# Altium PCB PWTSout.PcbDoc
Units mil, origin at the board's own origin, x right, y up, seen from the top; angles counter-clockwise.
Board outline 2315 x 3125 mil, 2 copper layers (Top Layer, Bottom Layer); 128 components, 32 nets, 363 pads, 71 vias.
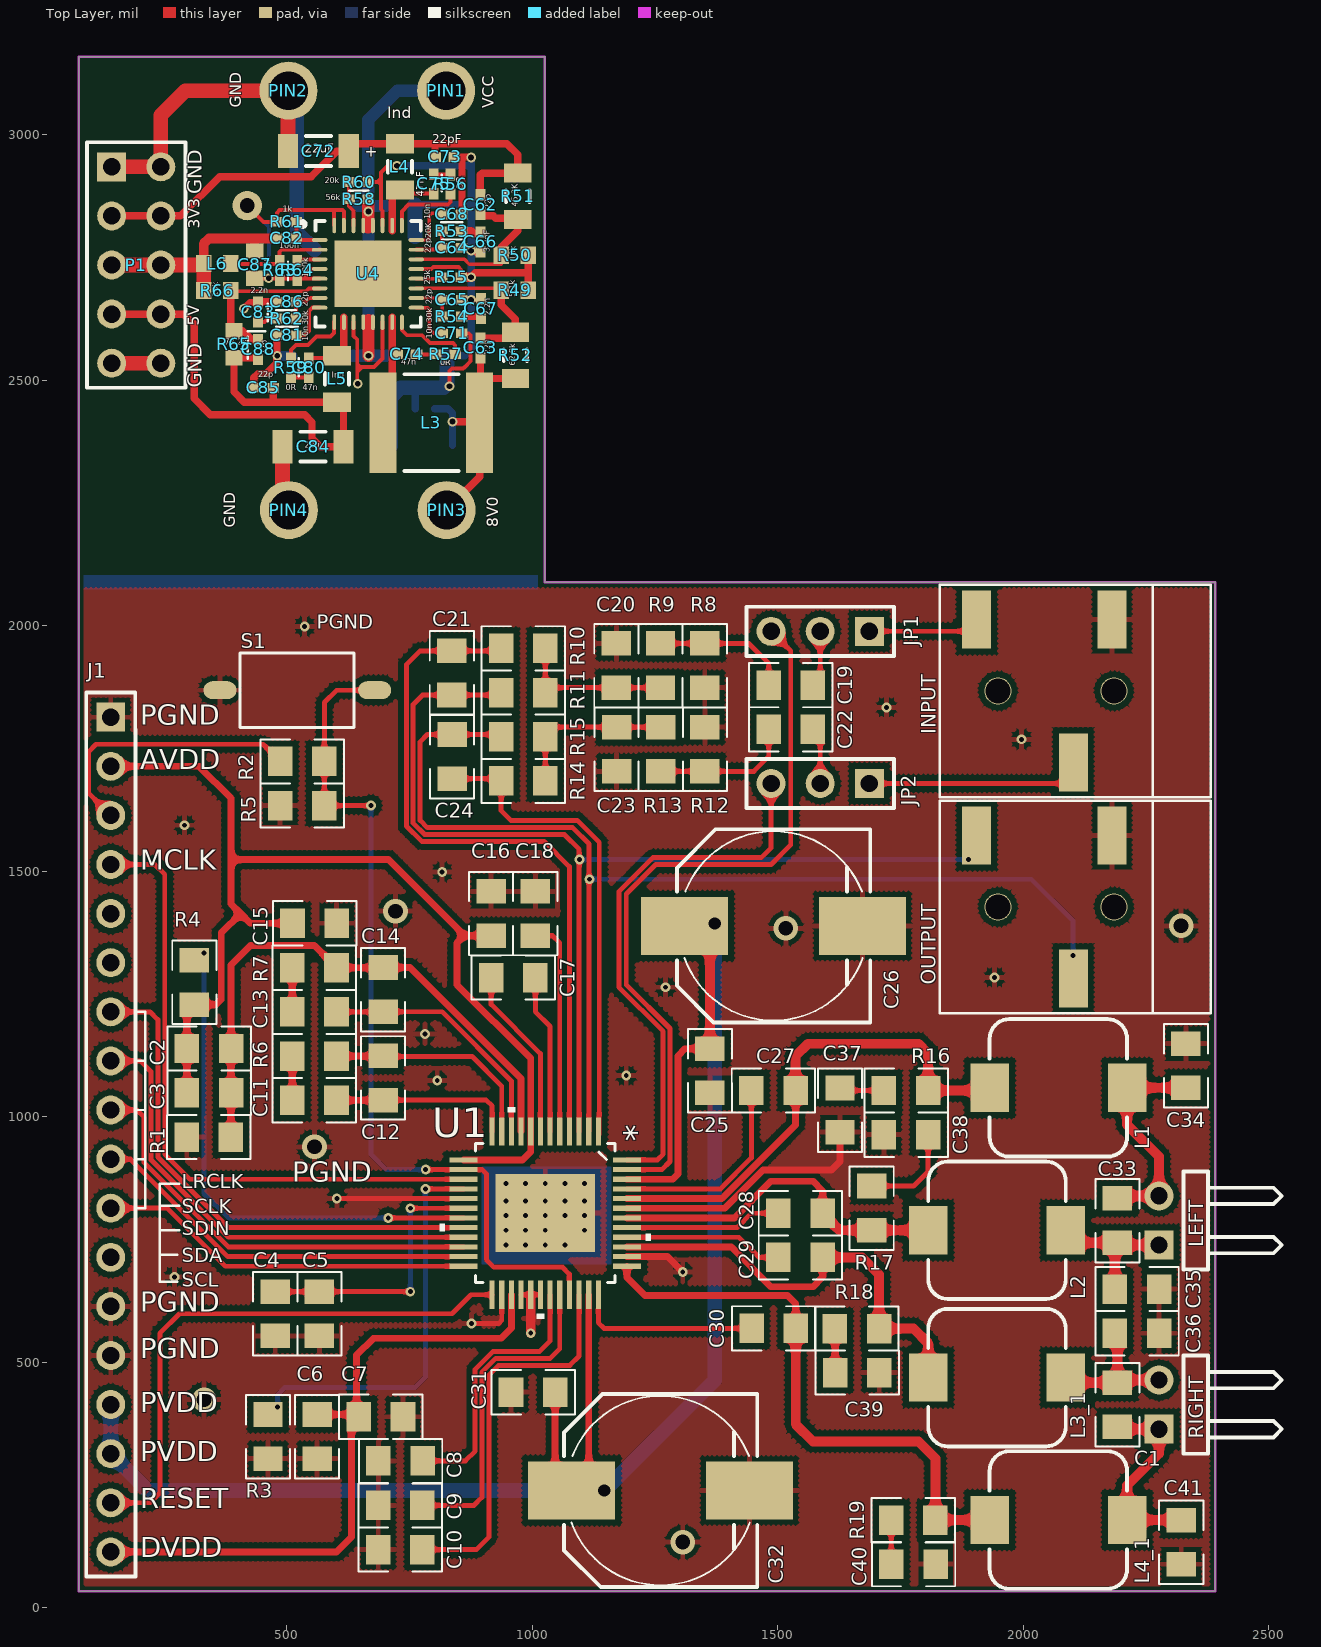
[diagram p0: Top Layer view]
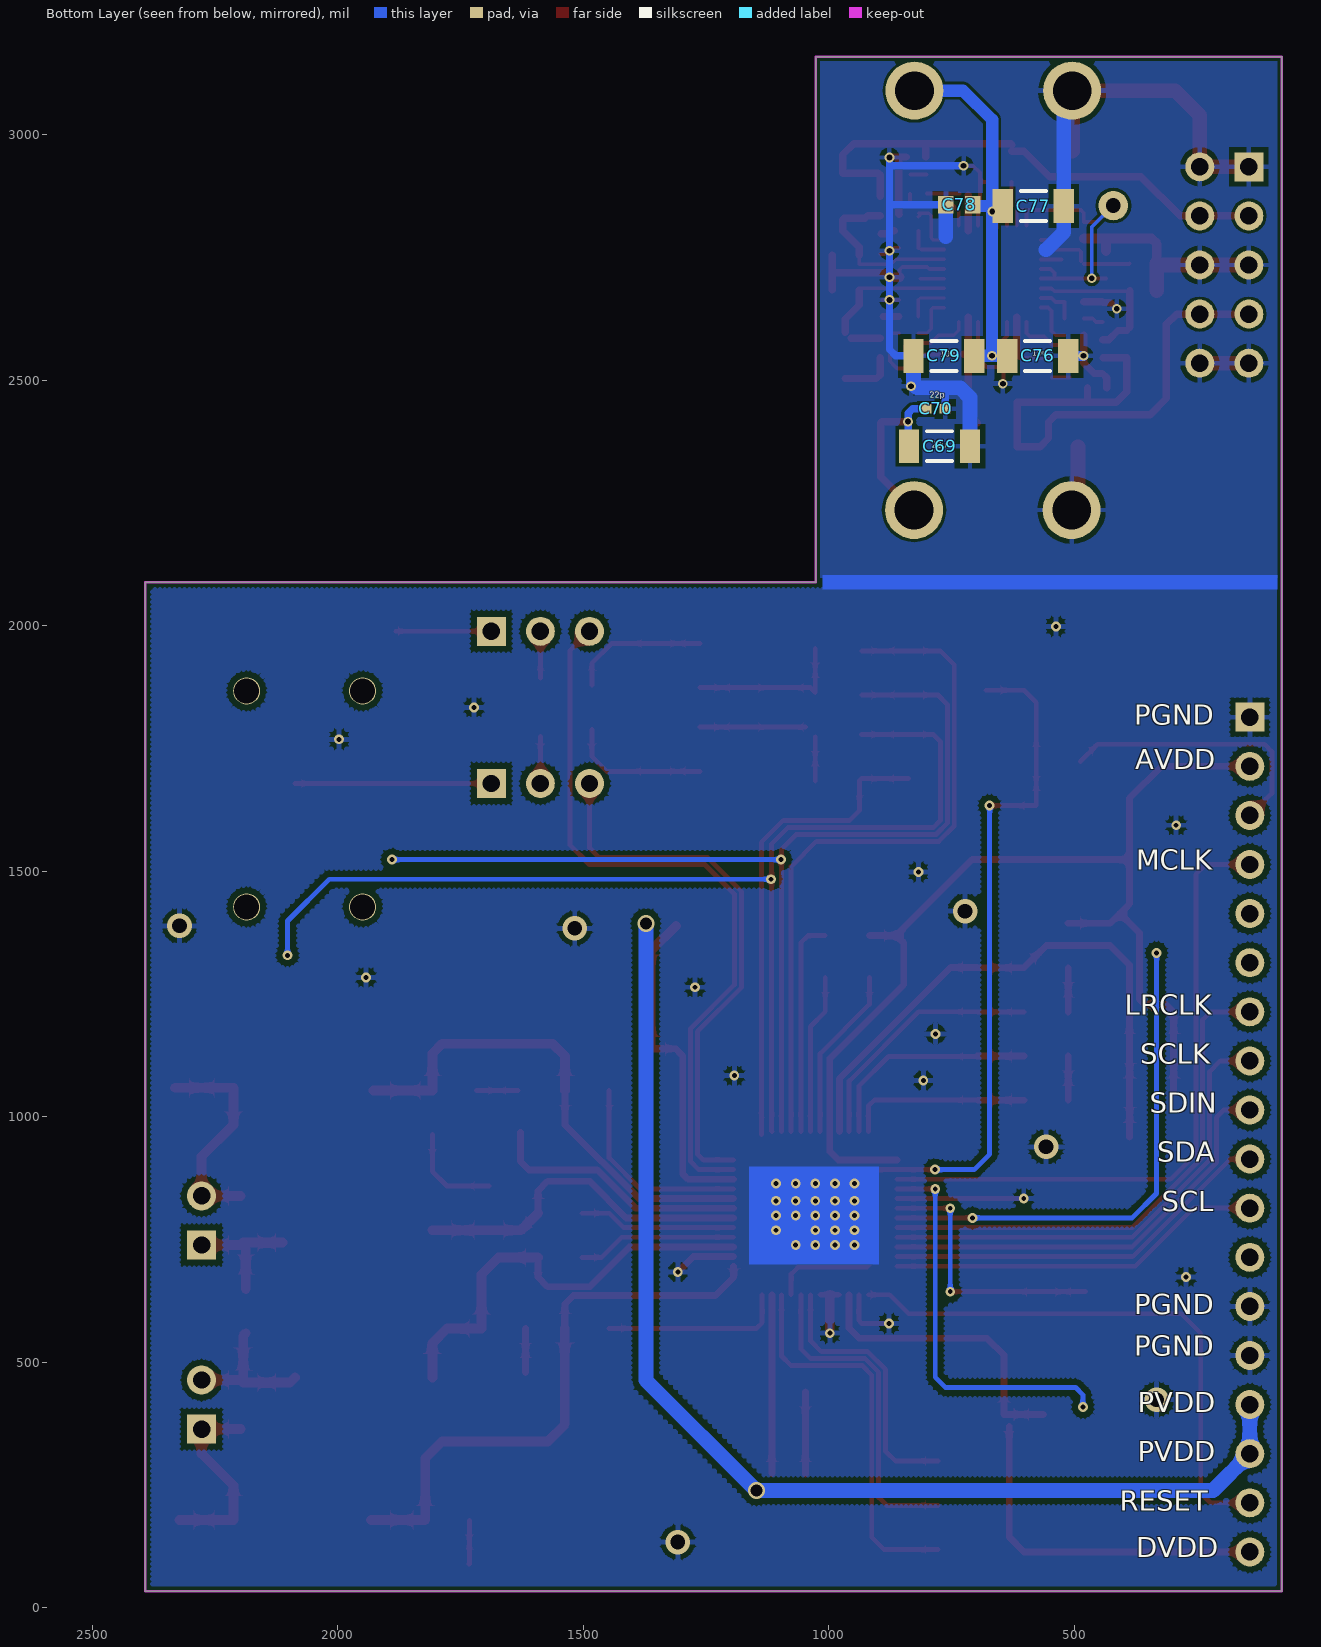
[diagram p1: Bottom Layer view, seen from below]

## Layer stack, top to bottom
Top Layer: signal copper 1.4
Dielectric: dielectric 12.6, FR-4, Dk 4.8
Bottom Layer: signal copper 1.4

## Board outline
77,34 77,3159 1026,3159 1026,2089 2392,2089 2392,34

## Design rules (kind name [scope] priority, off if disabled: settings)
Clearance [All] p1: gap=6
PolygonConnect [All] p1: connectstyle=Relief reliefconductorwidth=10 reliefentries=4 polygonreliefangle="90 Angle" airgapwidth=10
RoutingVias [All] p1: holewidth=28 width=50 viastyle="Through Hole" minholewidth=28 minwidth=50 maxholewidth=28 maxwidth=50
SolderMaskExpansion [All] p1: expansion=4
Width [All] p1: maxlimit=60 minlimit=6 preferedwidth=10 minimp=50.000000 maximp=50.000000 favimp=50.000000
28 further rules are at their usual default settings.

## Classes and differential pairs
component class POWER_TS: C62 C63 C64 C65 C66 C67 C68 C69 C70 C71 C72 C73 C74 C75 C76 C77 C78 C79 C80 C81 C82 C83 C84 C85 C86 C87 C88 L3 L4 L5 L6 P1 PIN1 PIN2 PIN3 PIN4 R49 R50 R51 R52 R53 R54 R55 R56 R57 R58 R59 R60 R61 R62 R63 R64 R65 R66 U4

## Components (designator, comment, footprint, x,y, rotation, side; value= is the part's Value field where it differs from the comment)
C1 "DNP/1206" 0805_C 2192,369 r90 top
C2 "10uF/6.3V" 0805_C 387,1139 r180 top
C3 "0.1uF/10V" 0805_C 387,1049 r180 top
C4 "4.7uF/6.3V" 0805_C 477.27,643.81 r270 top
C5 "0.1uF/10V" 0805_C 567.27,643.81 r270 top
C6 "10uF/6.3V" 0805_C 562,304 r90 top
C7 "0.1uF/10V" 0805_C 737,389 r180 top
C8 "0.1uF/10V" 0805_C 777,299 r180 top
C9 "2200pF/50V" 0805_C 687,209 r0 top
C10 "1uF/25V" 0805_C 687,119 r0 top
C11 "0.047uF/16V" 0805_C 512,1034 r0 top
C12 "4700pF/50V" 0805_C 697,1124 r270 top
C13 "0.047uF/16V" 0805_C 512,1214 r0 top
C14 "4700pF/50V" 0805_C 697,1304 r270 top
C15 "10uF/6.3V" 0805_C 602,1394 r180 top
C16 "1uF/25V" 0805_C 917,1459 r270 top
C17 "1uF/25V" 0805_C 917,1284 r0 top
C18 "1uF/25V" 0805_C 1007,1459 r270 top
C19 "1.5uF/50V" 0805_C 1572,1879 r180 top
C20 "1000pF/50V" 0805_C 1172,1964 r270 top
C21 "220pF/50V" 0805_C 837,1949 r270 top
C22 "1.5uF/50V" 0805_C 1572,1789 r180 top
C23 "1000pF/50V" 0805_C 1172,1704 r90 top
C24 "220pF/50V" 0805_C 837,1689 r90 top
C25 "0.1uF/50V" 0805_C 1362,1049 r90 top
C26 "220uF/35V" C-RB-S10 1492,1389 r0 top
C27 "0.033uF/50V" 0805_C 1447,1054 r0 top
C28 "0.033uF/50V" 0805_C 1502,804 r0 top
C29 "0.033uF/50V" 0805_C 1502,714 r0 top
C30 "0.033uF/50V" 0805_C 1537,569 r180 top
C31 "0.1uF/50V" 0805_C 1047,439 r180 top
C32 "220uF/35V" C-RB-S10 1262,239 r0 top
C33 "DNP/1206" 0805_C 2192,744 r90 top
C34 "0.33uF/50V" 0805_C 2332,1149 r270 top
C35 "0.33uF/50V" 0805_C 2277,649 r180 top
C36 "0.33uF/50V" 0805_C 2277,559 r180 top
C37 "330pF/50V" 0805_C 1627,969 r90 top
C38 "330pF/50V" 0805_C 1717,964 r0 top
C39 "330pF/50V" 0805_C 1707,479 r180 top
C40 "330pF/50V" 0805_C 1821.81,88.73 r180 top
C41 "0.33uF/50V" 0805_C 2322,89 r90 top
C62 "Cap" 0402 895,2858 r90 top
C63 "Cap" 0402 895,2566 r90 top
C64 "Cap" 0402 836.69,2770 r180 top
C65 "Cap" 0402 837,2664 r0 top
C66 "Cap" 0402 895,2782 r90 top
C67 "Cap" 0402 896,2646 r90 top
C68 "Cap" 0402 836.68,2838 r180 top
C69 "Cap" 1206 774,2366 r0 bottom
C70 "Cap" 0402 782,2442 r0 bottom
C71 "Cap" 0402 837,2596 r0 top
C72 "Cap" 1206 565,2967 r0 top
C73 "Cap" 0402 822,2955 r180 top
C74 "Cap" 0402 745,2553 r180 top
C75 "Cap" 0402 800,2900 r90 top
C76 "Cap" 1206 574,2550 r180 bottom
C77 "Cap" 1206 583,2855 r180 bottom
C78 "Cap" 1608[0603] 734,2858 r180 bottom
C79 "Cap" 1206 765,2550 r180 bottom
C80 "Cap" 0402 545,2525.69 r270 top
C81 "Cap" 0402 500,2592 r0 top
C82 "Cap" 0402 500,2789 r0 top
C83 "Cap" 0402 442,2639 r270 top
C84 "Cap" 1206 554,2365 r0 top
C85 "Cap" 0402 453,2485 r0 top
C86 "Cap" 0402 500,2660 r180 top
C87 "Cap" 1608[0603] 435,2736 r270 top
C88 "Cap" 0402 442,2563 r270 top
INPUT "Headphone" HeadPhone-3.5mm 2382,2084 r270 top
J1 "Header 18" HDR1X18 142,1814 r270 top
JP1 "Header 3" HDR1X3 1687,1989 r180 top
JP2 "Header 3" HDR1X3 1687,1679 r180 top
L1 "15uH" L-SMD-7 2072,1059 r0 top
L2 "15uH" L-SMD-7 1947,769 r0 top
L3 "Inductor" 2220 795,2414 r0 top
L3_1 "15uH" L-SMD-7 1947,469 r0 top (schematic designator L3)
L4 "Inductor" C2012 731,2935 r270 top
L4_1 "15uH" L-SMD-7 2072,179 r0 top (schematic designator L4)
L5 "Inductor" C2012 603,2503 r270 top
L6 "LED" 1608[0603] 359,2738 r180 top
LEFT "Header 2H" HDR1X2H 2277,739 r90 top
OUTPUT "Headphone" HeadPhone-3.5mm 2382,1644 r270 top
P1 "Header 5X2" HDR2X5 144,2935 r270 top
PIN1 "PIN" PIN 825,3090 r0 top
PIN2 "PIN" PIN 504,3090 r0 top
PIN3 "PIN" PIN 826,2236 r0 top
PIN4 "PIN" PIN 505,2236 r0 top
R1 "0" 0805_R 297,959 r0 top
R2 "DNP" 0805_R 487.19,1724.27 r0 top
R3 "18.2K" 0805_R 462,304 r90 top
R4 "10K" 0805_R 312,1229 r90 top
R5 "15K" 0805_R 487.19,1634.27 r0 top
R6 "470" 0805_R 512,1124 r0 top
R7 "470" 0805_R 512,1304 r0 top
R8 "5.6K" 0805_R 1352,1964 r270 top
R9 "5.6K" 0805_R 1262,1964 r270 top
R10 "5.6K" 0805_R 1027,1954 r180 top
R11 "10K" 0805_R 1027,1864 r180 top
R12 "5.6K" 0805_R 1352,1704 r90 top
R13 "5.6K" 0805_R 1262,1704 r90 top
R14 "5.6K" 0805_R 1027,1684 r180 top
R15 "10K" 0805_R 1027,1774 r180 top
R16 "18" 0805_R 1717,1054 r0 top
R17 "18" 0805_R 1692,859 r270 top
R18 "18" 0805_R 1617,569 r0 top
R19 "18" 0805_R 1731.81,178.73 r0 top
R49 "精密电阻" 1608[0603] 965,2684 r180 top
R50 "精密电阻" 1608[0603] 965,2755 r180 top
R51 "精密电阻" R2012 971,2875 r90 top
R52 "精密电阻" R2012 966,2551 r90 top
R53 "Res" 0402 836.69,2804 r180 top
R54 "Res" 0402 837,2630 r0 top
R55 "Res" 0402 836,2710 r0 top
R56 "Res" 0402 834,2899.68 r90 top
R57 "Res" 0402 824,2553 r0 top
R58 "Res" 0402 647,2869 r0 top
R59 "Res" 0402 509,2525.69 r90 top
R60 "Res" 0402 647,2904 r180 top
R61 "Res" 0402 500,2823 r0 top
R62 "Res" 0402 500,2626 r180 top
R63 "Res" 0402 486,2724 r270 top
R64 "Res" 0402 522,2724 r270 top
R65 "精密电阻" 1608[0603] 393,2574 r90 top
R66 "精密电阻" 1608[0603] 359,2683 r0 top
RIGHT "Header 2H" HDR1X2H 2277,364 r90 top
S1 "SW-PB" SMD_2214 522,1869 r90 top
U1 "TAS5719_PHP_48" PHP48_5P17X4P04 1027,804 r270 top
U4 "TPS65261" QFN50P500X500X100_HS-33N 666,2717 r0 top

## Footprints (in the part's own frame and the unit in brackets; to place one, negate y for a bottom-side part, rotate by r counter-clockwise, add the part's x,y. Pads: shape width x height; smd on the part's side, far side on the other; paste and mask are expansions set on the pad)
0402 [mm] "Chip Capacitor, Body 1.0x0.5mm, IPC High Density"
  rect 0.6x0.5 smd: 1(-0.5,0) 2(0.5,0)
  body extent -0.55,-0.3 0.55,0.3, height 1.3
0805_C [mil]
  rect 50x60 smd: 1(-0.19,-0.27) 2(89.81,-0.27)
  silkscreen extent -40,-45 130,45
0805_R [mil]
  rect 50x60 smd: 1(-0.19,-0.27) 2(89.81,-0.27)
  silkscreen extent -40,-45 130,45
1206 [mm]
  rect 1.05x1.75 smd: 1(-1.575,0) 2(1.575,0)
  silkscreen extent -0.65,-0.77 0.65,0.77, body extent -1.6,-0.8 1.6,0.8, height 1.6
1608[0603] [mm] "Chip Capacitor, Body 1.6x0.8mm, IPC High Density"
  rect 0.8x0.9 smd: 1(-0.7,0) 2(0.7,0)
  body extent -0.87,-0.48 0.87,0.48, height 1.3
2220 [mm] "Chip Capacitor, Body 5.7x5.0mm, IPC High Density"
  rect 1.4x5.2 smd: 1(-2.5,0) 2(2.5,0)
  silkscreen extent -1.4,-2.5 1.4,2.5, body extent -2.95,-2.63 2.95,2.63, height 1.4
C2012 [mm] "Chip Capacitor, 2-Leads, Body 2.0x1.2mm, IPC Low Density"
  rect 1x1.45 smd: 1(-1.2,0) 2(1.2,0)
  silkscreen extent -0.3,-0.63 0.3,0.63, body extent -0.98,-0.6 1.02,0.6, height 0.5
C-RB-S10 [mm]
  rect 4.5x3 smd: 1(-4.6,0) 2(4.6,0)
  silkscreen extent -5,-5 5,5
HDR1X2H [mm] "Connector; Header; 2 Position; Right Angle"
  rect 1.5x1.5 hole 0.9: 1(0,0)
  round 1.5 hole 0.9: 2(2.54,0)
  silkscreen extent -1.27,-6.35 3.81,-1.27
HDR1X3 [mm] "Connector; Header; 3 Position"
  rect 1.5x1.5 hole 0.9: 1(0,0)
  round 1.5 hole 0.9: 2(2.54,0) 3(5.08,0)
  silkscreen extent -1.27,-1.27 6.35,1.27
HDR1X18 [mm] "Connector; Header; 18 Position"
  rect 1.5x1.5 hole 0.9: 1(0,0)
  round 1.5 hole 0.9: 2(2.54,0) 3(5.08,0) 4(7.62,0) 5(10.16,0) 6(12.7,0) 7(15.24,0) 8(17.78,0) 9(20.32,0) 10(22.86,0) 11(25.4,0) 12(27.94,0) 13(30.48,0) 14(33.02,0) 15(35.56,0) 16(38.1,0) 17(40.64,0) 18(43.18,0)
  silkscreen extent -1.27,-1.27 44.45,1.27
HDR2X5 [mm] "Connector; Header; 5x2 Position"
  rect 1.5x1.5 hole 0.9: 1(0,0)
  round 1.5 hole 0.9: 2(0,2.54) 3(2.54,0) 4(2.54,2.54) 5(5.08,0) 6(5.08,2.54) 7(7.62,0) 8(7.62,2.54) 9(10.16,0) 10(10.16,2.54)
  silkscreen extent -1.27,-1.27 11.43,3.81, body extent -1.27,-1.27 11.43,3.81, height 7.58
HeadPhone-3.5mm [mm]
  rect 3x1.5 smd: 1(1.8,-5.1) 2(9.2,-7.1) 4(1.8,-12.1)
  round 1.4 hole 1.3: ""(5.5,-5) ""(5.5,-11)
  silkscreen extent 0,-14 11,0
L-SMD-7 [mm]
  rect 2x2.5 smd: 1(-3.556,0) 2(3.556,0)
  silkscreen extent -3.56,-3.56 3.56,3.56, body extent -3.56,-3.56 3.56,3.56, height 4
PHP48_5P17X4P04 [mm]
  rect 1.461x0.27 smd: 1(-4.225,2.75) 2(-4.225,2.25) 3(-4.225,1.75) 4(-4.225,1.25) 5(-4.225,0.75) 6(-4.225,0.25) 7(-4.225,-0.25) 8(-4.225,-0.75) 9(-4.225,-1.25) 10(-4.225,-1.75) 11(-4.225,-2.25) 12(-4.225,-2.75) 25(4.225,-2.75) 26(4.225,-2.25) 27(4.225,-1.75) 28(4.225,-1.25) 29(4.225,-0.75) 30(4.225,-0.25) 31(4.225,0.25) 32(4.225,0.75) 33(4.225,1.25) 34(4.225,1.75) 35(4.225,2.25) 36(4.225,2.75)
  rect 0.27x1.461 smd: 13(-2.75,-4.225) 14(-2.25,-4.225) 15(-1.75,-4.225) 16(-1.25,-4.225) 17(-0.75,-4.225) 18(-0.25,-4.225) 19(0.25,-4.225) 20(0.75,-4.225) 21(1.25,-4.225) 22(1.75,-4.225) 23(2.25,-4.225) 24(2.75,-4.225) 37(2.75,4.225) 38(2.25,4.225) 39(1.75,4.225) 40(1.25,4.225) 41(0.75,4.225) 42(0.25,4.225) 43(-0.25,4.225) 44(-0.75,4.225) 45(-1.25,4.225) 46(-1.75,4.225) 47(-2.25,4.225) 48(-2.75,4.225)
  rect 4.04x5.17 smd paste-2.572 mask-2.578: EPAD(0,0)
  silkscreen extent -5.46,-5.46 5.46,5.46, body extent -4.6,-4.6 4.6,4.6, height 1.2
PIN [mm]
  round 3 hole 2: 1(0,0)
QFN50P500X500X100_HS-33N [mm] "QFN, 32-Leads, Body 5.00x5.00mm, Pitch 0.50mm, Thermal Pad 3.45x3.45mm, IPC Medium Density TPS65261"
  oval 0.8x0.2 smd: 1(-2.5,1.75) 2(-2.5,1.25) 3(-2.5,0.75) 4(-2.5,0.25) 5(-2.5,-0.25) 6(-2.5,-0.75) 7(-2.5,-1.25) 8(-2.5,-1.75) 17(2.5,-1.75) 18(2.5,-1.25) 19(2.5,-0.75) 20(2.5,-0.25) 21(2.5,0.25) 22(2.5,0.75) 23(2.5,1.25) 24(2.5,1.75)
  oval 0.2x0.8 smd: 9(-1.75,-2.5) 10(-1.25,-2.5) 11(-0.75,-2.5) 12(-0.25,-2.5) 13(0.25,-2.5) 14(0.75,-2.5) 15(1.25,-2.5) 16(1.75,-2.5) 25(1.75,2.5) 26(1.25,2.5) 27(0.75,2.5) 28(0.25,2.5) 29(-0.25,2.5) 30(-0.75,2.5) 31(-1.25,2.5) 32(-1.75,2.5)
  rect 3.45x3.45 smd: 33(0,0)
  silkscreen extent -3.5,-2.73 2.73,2.73, body extent -2.58,-2.57 2.57,2.58, height 1
R2012 [mm] "Chip Resistor, 2-Leads, Body 2.0x1.2mm, IPC Low Density"
  rect 1x1.4 smd: 1(-1.2,0) 2(1.2,0)
  silkscreen extent -0.3,-0.6 0.3,0.6, body extent -0.98,-0.6 1.02,0.6, height 0.5
SMD_2214 [mm]
  oval 0.93x1.71 smd: 1(0,4) 2(0,-4)
  silkscreen extent -1.92,-2.93 1.93,2.97, body extent -1.85,-4.02 1.85,3.98, height 2.5

## Part data
C1 C2 C3 C4 C5 C6 C7 C8 C9 C10 C11 C12 C13 C14 C15 C16 C17 C18 C19 C20 C21 C22 C23 C24 C25 C27 C28 C29 C30 C31 C33 C34 C35 C36 C37 C38 C39 C40 C41: library part CAP, "Capacitor"
C26 C32: library part "CAPACITOR POL", "Capacitor"
C62 C63 C64 C65 C66 C67 C68 C69 C70 C71 C72 C73 C74 C75 C76 C77 C78 C79 C80 C81 C82 C83 C84 C85 C86 C87 C88: "贴片电容"
J1: "Header, 18-Pin"
JP1 JP2: "Header, 3-Pin"
L1 L2 L3_1 L4_1: library part 0630_IND
LEFT RIGHT: "Header, 2-Pin, Right Angle"
P1: "Header, 5-Pin, Dual row"
R1 R2 R3 R4 R5 R6 R7 R8 R9 R10 R11 R12 R13 R14 R15 R16 R17 R18 R19: library part RES
R49 R50 R51 R52 R65 R66: library part Res, "贴片电阻"
R53 R54 R55 R56 R57 R58 R59 R60 R61 R62 R63 R64: "贴片电阻"
S1: "Switch"
U1: "Imported"

## Free pads (board coordinates)
  round 60 hole 30: 0(420,2856)

## Via types
v1: diameter 20, hole 10, Top Layer to Bottom Layer, 50 vias
v2: diameter 19.8, hole 11.81, Top Layer to Bottom Layer, tented both sides, 13 vias
v3: diameter 50, hole 30, Top Layer to Bottom Layer, 6 vias
v4: diameter 35, hole 25, Top Layer to Bottom Layer, 2 vias

## Nets (pads, with @x,y where several pads share a name; then routed paths per layer and width w, separated by ;. In a path a pad name is that pad's centre, name@x,y a point inside that pad or via, vN(x,y) a via of type N, cw(c..) or ccw(c..) an arc to the next point about the centre after c; other vN are vias at no path point)
3V3: C62.2 C72.2 C73.2 L4.1 P1.3 P1.4 R51.2 | length 1075.9
  Top Layer w15: P1.3 P1.4 284,2835 364,2915 550,2915 602,2967 C72.2 ; C72.2@627.01,2980 629.25,2982.24 L4.1 948.76,2982.24 971,2960 R51.2 898.24,2922.24 894.68,2918.68 C62.2@894.68,2874.69 ; C73.2 802.31,2979.56
5V0: C84.2 C85.2 C88.2 L5.2 P1.7 P1.8 R65.1 | length 1160.7
  Top Layer w15: P1.7 P1.8 291,2635 312,2614 312,2463 345,2430 537,2430 552,2415 552,2382 569,2365 C84.2 616.01,2455.75 L5.2 414.24,2455.76 393,2477 R65.1 C88.2@441.13,2546.44 ; 472.69,2456.07 C85.2
8V0: C63.1 C69.2 C70.2 L3.2 PIN3.1 R52.1 | length 473.7
  Top Layer w15: PIN3.1 893.43,2303.43 L3.2 ; v2(838,2416) L3.2@891.43,2416 ; C63.1 895,2511 902.24,2503.76 R52.1
  Bottom Layer w15: C70.2 829,2442 838,2433 v2(838,2416) C69.2@838,2367.99
GND: C64.1 C65.2 C66.1 C67.2 C68.1 C69.1 C70.1 C71.2 C72.1 C73.1 C76.2 C77.2 C78.1 C79.1 C81.1 C82.1 C83.1 C84.1 C85.1 C86.2 C87.1 L6.2 P1.1 P1.2 P1.5 P1.6 P1.9 P1.10 PIN2.1 PIN4.1 R49.1 R50.1 R55.2 R60.1 R66.1 U4.11 U4.14 U4.21 U4.27 | length 4139.4
  Top Layer w8: U4.11 636.47,2590.53 644,2583 644,2533 ; v2(645,2493) 644,2494 644,2519 ; R60.1 685,2904 ; U4.14 695.53,2544.53 678.5,2527.5 654,2527.5 ; U4.27 695.53,2845.47 692,2849 692,2899 ; v2(725,2937) 706,2937 692,2923 692,2911 ; U4.21 794.84,2726.84 799,2731 850,2731 855.69,2725.31 R55.2 875,2710 v2@876,2711 ; v2(832,2488) 832,2519 837,2524 859.36,2524 861.72,2526.36 862.36,2526.36 875,2539 875,2592 871,2596 C71.2 ; C64.1 873,2770 885.68,2757.32 C66.1@894.68,2757.32 ; C65.2 v2(876,2664) C67.2@890.31,2664 ; 644,2519 644,2533 ; 644,2519 645.5,2519 654,2527.5 ; 644,2533 649.5,2527.5 654,2527.5 ; 685,2904 687,2904 692,2899 ; 685,2904 692,2911 ; 692,2899 692,2911
  Top Layer w15: v2(413,2646) 425.68,2658.68 C83.1 ; C85.1 433.32,2505.32 442,2514 459,2514 480.31,2535.31 C81.1 ; C83.1@443.32,2660 C86.2 ; C73.1 854,2955 ; C68.1 857.34,2838.97 857.34,2951.66 854,2955 ; v2@871,2954 870,2955 854,2955 ; v2@876,2711 884,2719 992.56,2719 ; R49.1 992.56,2719 ; R50.1 992.56,2719
  Top Layer w20: L6.2 331.44,2778.44 342,2789 C82.1 ; C87.1 435,2784 ; R55.2 875,2710 v2(876,2710)
  Top Layer w30: P1.9 P1.10 ; P1.5 P1.6 L6.2@328.44,2735 ; P1.1 P1.2 244,3040 294,3090 PIN2.1 ; R66.1 L6.2 ; C84.1 491.99,2249.01 PIN4.1 ; C72.1 PIN2.1@502.99,3088.99
  Bottom Layer w15: v2(725,2937) 875,2937 ; C78.1 875,2858 ; C70.1 762.32,2481.32 766,2485 ; C79.1 863,2550 876,2563 v2(876,2664) v2(876,2710) v2(876,2764) v2@876,2949
  Bottom Layer w20: v2(481,2550) C76.2
  Bottom Layer w30: PIN2.1@520.99,3073.01 C77.2 520.99,2802.01 557,2766 ; C69.1 711.99,2464.99 732,2485 766,2485 820,2485 827.01,2492.01 C79.1 ; 761.56,2792.56 C78.1
  other v2: 876,2954
NetC62_1: C62.1 R50.2 R51.1 U4.22 | length 358.2
  Top Layer w7: U4.22 862.47,2746.53 872.56,2736.44 937.44,2736.44 R50.2
  Top Layer w15: C62.1@894.68,2835.32 920.68,2835.32 925.68,2830.32 R51.1@968.44,2830.32 ; R50.2 937.44,2771.44 971,2805 R51.1
NetC63_2: C63.2 R49.2 R52.2 U4.19 | length 330.5
  Top Layer w7: U4.19 933.97,2687.47 R49.2
  Top Layer w15: C63.2 R52.2@953.44,2585.69 ; R49.2 937.44,2653.56 966,2625 R52.2
NetC64_2: C64.2 R53.2 U4.23 | length 80.4
  Top Layer w8: U4.23 C64.2@810.79,2766.21 ; C64.2 R53.2
NetC65_1: C65.1 R54.1 U4.18 | length 83.1
  Top Layer w7: U4.18 C65.1@813.53,2667.79 ; R54.1 C65.1
NetC66_2: C66.2 R53.1 | length 28.9
  Top Layer w15: R53.1@866,2805 876,2805 882,2799 C66.2@892.37,2799
NetC67_1: C67.1 R54.2 | length 31.6
  Top Layer w15: R54.2 C67.1@888.31,2630
NetC68_2: C68.2 U4.24 | length 110.2
  Top Layer w7: U4.24 786.9,2785.9 791,2790 791,2835 796,2840 C68.2@810,2840 ; C68.2@816,2840 C68.2@810,2840 ; C68.2@817,2833 814.5,2835.5 813,2837 C68.2@810,2840
NetC71_1: C71.1 U4.17 | length 97.9
  Top Layer w7: U4.17 787.9,2648.1 791,2645 791,2605 800,2596 C71.1
NetC74_1: C74.1 R57.1 | length 39.6
  Top Layer w8: C74.1 R57.1
NetC74_2: C74.2 L3.1 U4.15 | length 232.8
  Top Layer w15: L3.1 715.21,2432.64 C74.2@715.21,2553 ; U4.15@715.21,2629 U4.15 C74.2@715.21,2553 ; C74.2 C74.2@715.21,2553
NetC75_1: C75.1 L4.2 U4.26 | length 138.5
  Top Layer w8: L4.2@733.44,2880.32 C75.1
  Top Layer w15: U4.26@715.21,2805 U4.26 L4.2@715.21,2876.97
NetC75_2: C75.2 R56.2 | length 33.7
  Top Layer w8: C75.2 R56.2@833.68,2919.69
NetC80_1: C80.1 L5.1 U4.10 | length 144.1
  Top Layer w8: C80.1 L5.1@611.13,2545.37
  Top Layer w15: L5.1@616.79,2551.03 U4.10 U4.10@616.79,2629
NetC80_2: C80.2 R59.1 | length 36
  Top Layer w8: R59.1 C80.2
NetC81_2: C81.2 U4.8 | length 94.6
  Top Layer w8: C81.2 537,2592 546,2601 546,2641 553.1,2648.1 U4.8
NetC82_2: C82.2 R61.2 U4.1 | length 82.6
  Top Layer w8: R61.2@520,2822 520.1,2821.9 520.1,2787.58 521.79,2785.9 U4.1
NetC83_2: C83.2 R62.2 | length 41.1
  Top Layer w8: C83.2 455.31,2619.31 462,2626 R62.2
NetC86_1: C86.1 R62.1 U4.7 | length 85.1
  Top Layer w8: R62.1 C86.1 538,2660 545.79,2667.79 U4.7
NetC88_1: C88.1 R65.2 R66.2 U4.6 | length 315.9
  Top Layer w8: R66.2 388.06,2681.5 539.7,2681.5 545.67,2687.47 U4.6
  Top Layer w15: R65.2@386.56,2608 R66.2 ; R65.2 410.44,2601.56 429.32,2582.68 C88.1
NetL6_1: L6.1 R63.1 U4.2 | length 196.7
  Top Layer w8: L6.1 387.75,2736.81 R63.1@480.13,2736.81 ; R63.1@486,2742.68 R63.1 486,2762 490.16,2766.16 567.52,2766.16 U4.2
NetR55_1: R55.1 U4.20 | length 49
  Top Layer w7: U4.20 R55.1@813.47,2707.16
NetR56_1: R56.1 U4.25 | length 152.5
  Top Layer w8: U4.25 734.9,2843.9 748.84,2857.84 828.84,2857.84 834,2863 R56.1
NetR57_2: R57.2 U4.16 | length 156.3
  Top Layer w8: U4.16 734.9,2602.1 745,2592 776,2592 792,2576 839,2576 843.69,2571.31 R57.2
NetR58_1: R58.1 R60.2 U4.30 | length 92.4
  Top Layer w8: R60.2 R58.1 627.32,2854.68 636.47,2845.53 U4.30
NetR59_2: R59.2 U4.9 | length 145.3
  Top Layer w8: R59.2@509,2541.37 R59.2 509,2562 519.16,2572.16 544.16,2572.16 561,2589 590,2589 597.1,2596.1 U4.9
NetR64_1: R64.1 U4.3 | length 41.7
  Top Layer w8: R64.1@525.84,2746.53 U4.3
V7V: C87.2 pad.0 R61.1 R63.2 R64.2 U4.4 U4.5 U4.31 U4.32 | length 634.2
  Top Layer w8: pad.0 453,2823 R61.1 480.32,2841.32 486,2847 597.1,2847 ; C87.2@435.28,2707.16 539,2707.16 ; U4.5 539,2707.16 ; U4.4 547.84,2726.84 540,2719 540,2708.16 539,2707.16 ; U4.32 597.1,2847 ; U4.31 616.79,2844.21 614,2847 597.1,2847
  Bottom Layer w8: pad.0 464,2812 v2(464,2708)
VCC: C76.1 C77.1 C78.2 C79.2 PIN1.1 R58.2 U4.12 U4.13 U4.28 U4.29 | length 900.3
  Top Layer w25: 666,2812 666,2818 666.69,2818.69 v2(666.69,2844) R58.2@666.69,2861 ; v2(667,2550) 667,2623
  Bottom Layer w25: C76.1 v2(667,2550) ; C77.1 666.69,2855 ; v2@667,2844 v2(667,2550) ; C79.2 v2(667,2550) ; C78.2@703.44,2855 666.69,2855 ; PIN1.1 726,3090 666.69,3030.69 666.69,2855
pads on no net: C1.1 C1.2 C2.1 C2.2 C3.1 C3.2 C4.1 C4.2 C5.1 C5.2 C6.1 C6.2 C7.1 C7.2 C8.1 C8.2 C9.1 C9.2 C10.1 C10.2 C11.1 C11.2 C12.1 C12.2 C13.1 C13.2 C14.1 C14.2 C15.1 C15.2 C16.1 C16.2 C17.1 C17.2 C18.1 C18.2 C19.1 C19.2 C20.1 C20.2 C21.1 C21.2 C22.1 C22.2 C23.1 C23.2 C24.1 C24.2 C25.1 C25.2 C26.1 C26.2 C27.1 C27.2 C28.1 C28.2 C29.1 C29.2 C30.1 C30.2 C31.1 C31.2 C32.1 C32.2 C33.1 C33.2 C34.1 C34.2 C35.1 C35.2 C36.1 C36.2 C37.1 C37.2 C38.1 C38.2 C39.1 C39.2 C40.1 C40.2 C41.1 C41.2 INPUT. INPUT.1 INPUT.2 INPUT.4 J1.1 J1.2 J1.3 J1.4 J1.5 J1.6 J1.7 J1.8 J1.9 J1.10 J1.11 J1.12 J1.13 J1.14 J1.15 J1.16 J1.17 J1.18 JP1.1 JP1.2 JP1.3 JP2.1 JP2.2 JP2.3 L1.1 L1.2 L2.1 L2.2 L3_1.1 L3_1.2 L4_1.1 L4_1.2 LEFT.1 LEFT.2 OUTPUT. OUTPUT.1 OUTPUT.2 OUTPUT.4 R1.1 R1.2 R2.1 R2.2 R3.1 R3.2 R4.1 R4.2 R5.1 R5.2 R6.1 R6.2 R7.1 R7.2 R8.1 R8.2 R9.1 R9.2 R10.1 R10.2 R11.1 R11.2 R12.1 R12.2 R13.1 R13.2 R14.1 R14.2 R15.1 R15.2 R16.1 R16.2 R17.1 R17.2 R18.1 R18.2 R19.1 R19.2 RIGHT.1 RIGHT.2 S1.1 S1.2 U1.1 U1.2 U1.3 U1.4 U1.5 U1.6 U1.7 U1.8 U1.9 U1.10 U1.11 U1.12 U1.13 U1.14 U1.15 U1.16 U1.17 U1.18 U1.19 U1.20 U1.21 U1.22 U1.23 U1.24 U1.25 U1.26 U1.27 U1.28 U1.29 U1.30 U1.31 U1.32 U1.33 U1.34 U1.35 U1.36 U1.37 U1.38 U1.39 U1.40 U1.41 U1.42 U1.43 U1.44 U1.45 U1.46 U1.47 U1.48 U1.EPAD U4.33
copper on no net: | length 44621.5
  Top Layer w10: 142,214 222,214 242,234 242,559 282,599 837,599 875.66,637.66 918.73,637.66 ; 142,814 257,814 375.27,695.73 860.66,695.73 ; 142,914 182,914 380.58,715.42 860.66,715.42 ; 142,1014 195,1014 210,999 210,906.6 381.5,735.1 860.66,735.1 ; 142,1114 202,1114 224,1092 224,912.4 381.61,754.79 860.66,754.79 ; 142,1214 222,1214 238,1198 238,918.2 381.73,774.47 860.66,774.47 ; 142,1514 232,1514 252,1494 252,924 303.1,872.9 860.66,872.9 ; 142,1614 97,1659 97,1744 112,1759 452,1759 487,1724 ; 477,644 567,644 v1(752.16,644) ; 601.81,1213.73 696.27,1213.73 ; v1(602.47,833.53) 860.66,833.53 ; v1(672,1634) 577,1634 577,1724 577,1844 602,1869 679.48,1869 ; 696.73,1034.19 906.81,1034.19 918.73,1022.27 918.73,970.34 ; 696.73,1214.19 816.81,1214.19 958.1,1072.9 958.1,970.34 ; 697.19,1123.73 697.92,1123 878,1123 938.42,1062.58 938.42,970.34 ; v1(707.16,794.16) 860.66,794.16 ; v1(752.16,813.84) 860.66,813.84 ; 776.81,118.73 886.73,118.73 912,144 912,474 932,494 1077,494 1095.9,512.9 1095.9,637.66 ; 776.81,208.73 881.73,208.73 898,225 898,479.8 926.2,508 1037,508 1056.53,527.53 1056.53,637.66 ; 777.19,299.27 864.27,299.27 884,319 884,485.6 920.4,522 1015,522 1036.84,543.84 1036.84,637.66 ; v1(782.79,853.21) 860.66,853.21 ; v1(783.42,892.58) 898.42,892.58 907,884 907,709 922,694 1062,694 1076.21,679.79 1076.21,637.66 ; 837.27,1688.81 932.65,1688.81 937.19,1684.27 937.19,1623.81 957,1604 1092,1604 1137,1559 1137,964 ; v1(877,579) 932,579 938.42,585.42 938.42,637.66 ; 916.81,1283.73 916.81,1229.19 1017.16,1128.84 1017.16,970.34 ; 932.11,1859.19 836.73,1859.19 777.19,1859.19 758,1840 758,1598.2 781.2,1575 1066,1575 1095.9,1545.1 1095.9,970.34 ; 932.11,1949.19 836.73,1949.19 772.19,1949.19 744,1921 744,1592.4 775.4,1561 1025,1561 1076.21,1509.79 1076.21,970.34 ; 932.65,1778.81 837.27,1778.81 786.81,1778.81 772,1764 772,1604 787,1589 1083,1589 1116,1556 1116,970.76 1115.58,970.34 ; 977.79,637.66 997.47,637.66 1017.16,637.66 ; 1006.73,1369.19 1041.81,1369.19 1056.53,1354.47 1056.53,970.34 ; 1006.81,1283.73 1006.81,1214.19 1036.84,1184.16 1036.84,970.34 ; 1027.19,1684.27 1027.19,1774.27 ; 1027.19,1954.27 1027.19,1864.27 1037.11,1874.19 1171.73,1874.19 1261.73,1874.19 ; 1046.73,1793.81 1172.27,1793.81 1262.27,1793.81 ; 1135.27,637.66 1135.27,580.73 1146.73,569.27 1447.19,569.27 ; 1193.34,754.79 1421.21,754.79 1462.27,713.73 1501.81,713.73 ; 1193.34,774.47 1417.47,774.47 1446.73,803.73 1501.81,803.73 ; 1193.34,853.21 1383.58,853.21 1446.81,916.44 1446.81,1053.73 ; 1193.34,892.58 1264.58,892.58 1281,909 1281,1180 1192,1269 1192,1454 1252,1514 1487,1514 1527,1554 1527,1949 1487,1989 ; 1193.34,912.27 1255.27,912.27 1267,924 1267,1174.2 1177,1264.2 1177,1458.8 1246.2,1528 1467,1528 1487,1548 1487,1679 ; 1261.73,1964.19 1351.73,1964.19 1441.81,1964.19 1482.19,1923.81 1482.19,1879.27 ; 1262.27,1703.81 1352.27,1703.81 1451.81,1703.81 1482.19,1734.19 1482.19,1789.27 ; 1587,1679 1587,1774.46 ; 1587,1894.08 1587,1989 ; 1632.35,1053.73 1716.81,1053.73 ; 1687,1679 2087,1679 ; 1687,1989 1881.49,1989 ; 1691.73,859.19 1777.19,859.19 1806.81,888.81 1806.81,963.73 ; 1731.62,178.46 1731.62,89.38 1732,89
  Top Layer w14: 142,114 602,114 632,144 632,369 ; 142,1714 322,1714 387,1649 387,1524 ; 297.19,1049.27 297.19,1139.27 297.19,1213.73 312.27,1228.81 356.81,1228.81 367,1239 367,1374.27 406.86,1414.13 ; 386.81,958.73 386.81,1138.89 387.19,1139.27 387.19,1309.19 427,1349 556.54,1349 601.81,1303.73 696.27,1303.73 696.73,1304.19 751.81,1304.19 977.79,1078.21 977.79,970.34 ; 511.81,1033.73 511.81,1123.73 ; 511.81,1213.73 511.81,1303.73 ; 512.19,1394.27 426.73,1394.27 406.86,1414.13 ; 562.27,393.81 642.65,393.81 642.65,514.65 677,549 937,549 958.1,570.1 958.1,637.66 ; 601.81,1033.73 696.27,1033.73 ; 601.81,1123.73 697.19,1123.73 ; 860.66,912.27 980.27,912.27 997.47,929.47 997.47,1118.53 847,1269 847,1354 862.19,1369.19 ; 916.73,1369.19 862.19,1369.19 ; 1047.19,272.71 1047.19,439.27 ; 1115.58,273.68 1115.58,637.66 ; 1193.34,695.73 1193.34,672.66 1230,636 1520,636 1537.19,618.81 1537.19,569.27 ; 1193.34,715.42 1275.58,715.42 v1(1307,684) ; 1193.34,735.1 1405.9,735.1 1487,654 1572,654 1591.81,673.81 1591.81,713.73 ; 1193.34,794.16 1412.16,794.16 1487,869 1572,869 1591.81,849.19 1591.81,803.73 ; 1193.34,813.84 1392.3,813.84 1470.46,892 1610,892 1627.27,909.27 1627.27,968.81 ; 1193.34,833.53 1386.53,833.53 1536.81,983.81 1536.81,1053.73 ; 1193.34,872.9 1285.9,872.9 1297,884 1297,1124 1311.81,1138.81 1362.27,1138.81 ; 1616.81,568.73 1617.19,568.35 1617.19,479.27 ; 387,1524 387,1434 406.86,1414.13 ; 387,1524 707.38,1524 862.19,1369.19
  Top Layer w20: v1(997.47,559.47) 997.47,637.66 ; 1310.9,1389 1362.27,1337.63 1362.27,1138.81 ; 1536.81,1053.73 1536.81,1123.81 1562,1149 1787,1149 1806.81,1129.19 1806.81,1053.73 1926.73,1053.73 ; 1537.19,569.27 1537.19,373.81 1572,339 1787,339 1821.62,304.38 1821.62,178.46 1822.16,179 1932,179 ; 1591.81,713.73 1672.27,713.73 1706.81,679.19 1706.81,568.73 1777.27,568.73 1807,539 1807,469 ; 1591.81,803.73 1626.35,769.19 1691.73,769.19 1806.81,769.19 ; 2087,469 2097.19,458.81 2192.27,458.81 2192.27,554.19 2187.19,559.27 ; 2112.19,743.81 2192.27,743.81 2187.19,738.73 2187.19,649.27 ; 2197.08,364 2277,364 2277,314 2212,249 2212,179 2322.08,179 ; 2197.08,739 2277,739 ; 2197.46,464 2277,464 ; 2197.46,839 2277,839 2277,919 2212,984 2212,1059 ; 2212.19,1059.19 2331.73,1059.19
  Bottom Layer w10: v1(332,1334) 332,844 381.84,794.16 v1(707.16,794.16) ; v1(482,409) 482,434 497,449 762,449 782.79,469.79 v1(782.79,853.21) ; v1(672,1634) 672,924 703.42,892.58 v1(783.42,892.58) ; v1(752.16,644) v1(752.16,813.84) ; v1(1097,1524) v1(1889,1524) ; v1(1117,1484) 2017,1484 2102,1399 v1(2102,1329)
  Bottom Layer w30: 142,414 142,314 217,239 v4(1147,239) 1372,464 v4(1372,1394)
  other v1: 272,674 947,739 987,739 1027,739 1067,739 947,769 987,769 1027,769 1107,769 947,799 987,799 1027,799 1067,799 1107,799 947,829 987,829 1027,829 1067,829 1107,829 947,864 987,864 1027,864 1067,864 1107,864 807,1074 1192,1084 782,1169 1272,1264 1942,1284 817,1499 292,1594 1997,1769 1722,1834 537,1999
  other v3: 1307,134 332,424 557,939 1517,1384 2322,1389 722,1419

## Polygon pours and split planes (outlines as drawn)
no net on Bottom Layer "Bottom Layer-No Net" (hatched 90Degree grid 0 track 10, remove dead copper, pour order 6): 37,2144 2422,2144 2467,2099 2482,2084 2482,-76 112,-76 -3,39
GND on Bottom Layer "Top Layer-No Net" (solid, pour order 3): 102,3159 77,3159 77,3134.27 77,2089 78,2090.08 119,2090.08 120,2089 1026,2089 1026,2124.49 1026,3159 997,3159
no net on Top Layer "Bottom Layer-No Net" (hatched 90Degree grid 0 track 10, remove dead copper, pour order 4): -3,2169 12,2154 2502,2154 2502,-21 2452,-71 2437,-56 -3,-56

## Keep-outs
Keep-Out Layer:
  lines w5: 77,34 77,2089 77,3159 1026,3159 1026,2089 2392,2089 2392,34 77,34

## Other copper
Bottom Layer:
  rectangle net GND: 86,2074 1012,2104
  rectangle: 897,699 1162,899

## Silkscreen, mask and mechanical layers (free items; w line width, h text height)
Top Overlay:
  lines w5: 192,814 212,814 212,1214 192,1214 ; 192,914 212,914 ; 192,1014 212,1014 ; 192,1114 212,1114 ; 242,719 277,719 ; 242,769 282,769 ; 277,664 242,664 242,819 ; 282,819 242,819 ; 282,864 242,864 242,819 ; 421,2544 421,2589 ; 421,2600 457,2600 ; 462,2620 462,2656 ; 479,2609 523,2609 ; 479,2643 519,2643 ; 503,2704 503,2742 ; 525,2508 525,2545 ; 628,2886 667,2886 ; 815,2822 858,2822 ; 816,2885 816,2919 ; 817,2787 860,2787
  lines w8: 192,64 192,1789
  text "GND" at 416,3055 h40 r90
  text "VCC" at 930,3054 h40 r90
  text "Ind" at 705,3026 h40
  text "22pF" at 797,2977 h30
  text "22uF" at 537,2958 h30
  text "+" at 659,2947 h40
  text "20k" at 578,2897 h20
  text "0R" at 866,2888 h25 r90
  text "GND" at 337.22,2879 h50 r90
  text "47nF" at 785,2874 h25 r90
  text "56k" at 580,2863 h20
  text "45.3K" at 975,2854 h20 r90
  text "22p" at 920,2849 h20 r90
  text "1k" at 492,2839 h20
  text "10n" at 797,2828 h20 r90
  text "3V3" at 331,2809 h40 r90
  text "20K" at 799,2790 h20 r90
  text "100n" at 485,2765 h20
  text "3.3nF" at 918,2761 h20 r90
  text "22p" at 798,2759 h20 r90
  text "10k" at 971,2744 h20 r90
  text "<" at 355,2732 h20
  text "1u" at 425,2730 h20
  text "10k" at 471,2721 h20 r90
  text "100k" at 548,2710 h20 r90
  text "25k" at 797,2695 h20 r90
  text "2.2n" at 427,2673 h20
  text "10k" at 365,2670 h20 r90
  text "5.1k" at 970,2669 h20 r90
  text "22p" at 800,2655 h20 r90
  text "22p" at 547,2650 h20 r90
  text "2.2n" at 919,2632 h20 r90
  text "30k" at 801,2617 h20 r90
  text "30k" at 548,2612 h20 r90
  text "5V" at 330.53,2611 h40 r90
  text "10n" at 801,2585 h20 r90
  text "10n" at 548,2580 h20 r90
  text "73.2k" at 374,2569 h20
  text "22p" at 919,2552 h20 r90
  text "22p" at 465,2551 h20 r90
  text "62.9k" at 970,2530 h20 r90
  text "47n" at 734,2528 h20
  text "0R" at 813,2527 h20
  text "22p" at 442,2502 h20
  text "Ind" at 592,2501 h20
  text "GND" at 337.22,2485 h50 r90
  text "0R" at 498,2476 h20
  text "47n" at 533,2476 h20
  text "22u" at 537,2359 h20
  text "8V0" at 939,2201 h40 r90
  text "GND" at 404,2200 h40 r90
  text "PGND" at 562,1984 h50
  text "PGND" at 202,1784 h70
  text "AVDD" at 202,1694 h70
  text "MCLK" at 202,1489 h70
  text "PGND" at 512,854 h70
  text "LRCLK" at 287,844 h50
  text "SCLK" at 287,794 h50
  text "SDIN" at 287,749 h50
  text "SDA" at 287,694 h50
  text "SCL" at 287,644 h50
  text "PGND" at 202,589 h70
  text "PGND" at 202,494 h70
  text "PVDD" at 202,384 h70
  text "PVDD" at 202,284 h70
  text "RESET" at 202,189 h70
  text "DVDD" at 202,89 h70
Bottom Overlay:
  text "10u" at 585,2546 h20
  text "10u" at 773,2544 h20
  text "22p" at 794,2461 h20
  text "22u" at 790,2359 h20
  text "PGND" at 377.13,1784 h70
  text "AVDD" at 375.12,1694 h70
  text "MCLK" at 373.63,1489 h70
  text "LRCLK" at 397,1194 h70
  text "SCLK" at 365.01,1094 h70
  text "SDIN" at 346.02,994 h70
  text "SDA" at 330.34,894 h70
  text "SCL" at 321.14,794 h70
  text "PGND" at 377.13,584 h70
  text "PGND" at 377.13,499 h70
  text "PVDD" at 370.19,384 h70
  text "PVDD" at 370.19,284 h70
  text "RESET" at 407,184 h70
  text "DVDD" at 373.63,89 h70

## Text inside footprints (layer, text, board x,y; h text height)
U1: Top Overlay "*" at 1165.11,984.1 h50 r270; Mechanical 13 "*" at 1165.11,984.1 h50 r270